# EAGLE board BOARD_FILE_ARDUINO_UNO (EAGLE 9.6.2)
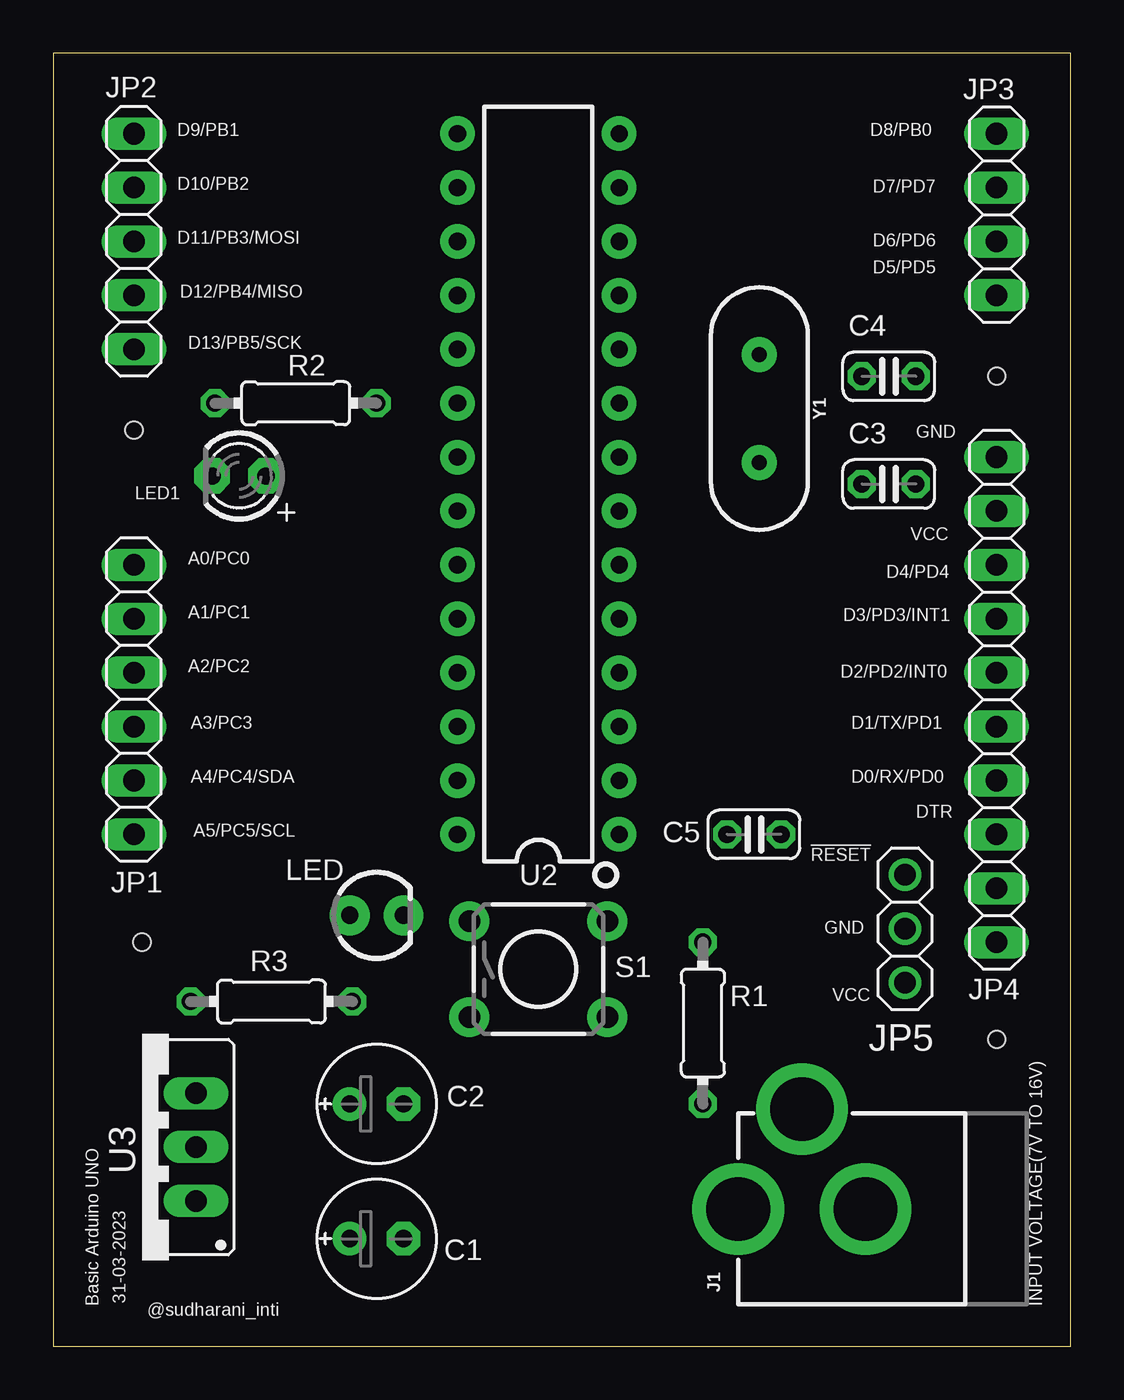
[diagram p0: board, top side]
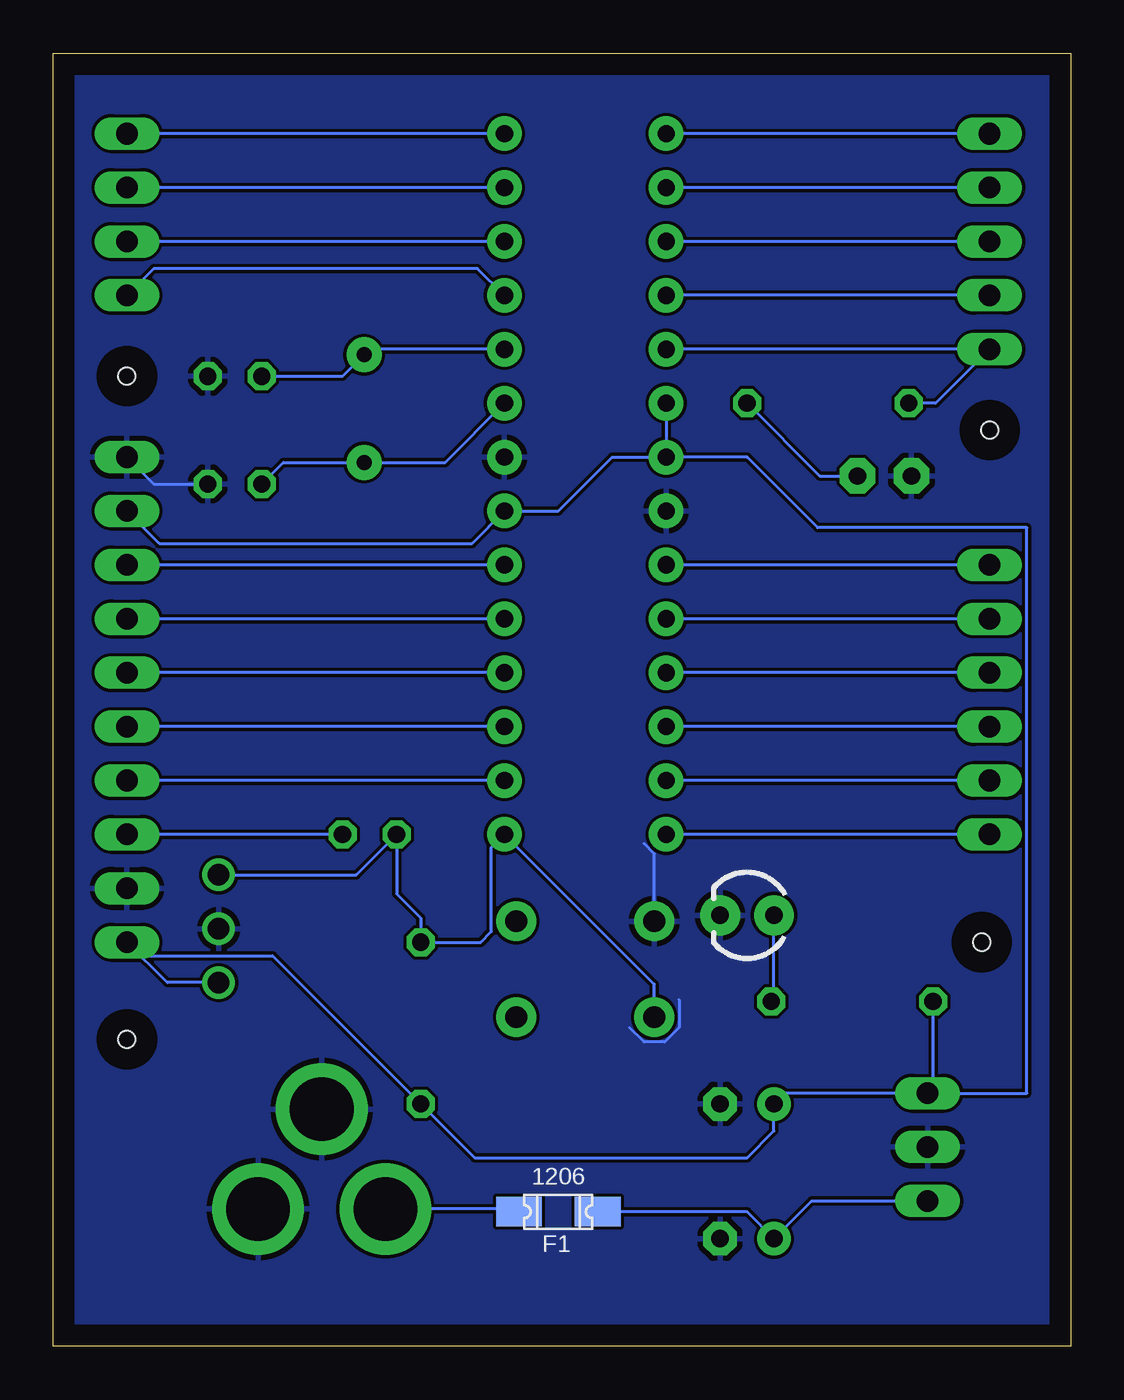
[diagram p1: board, bottom side, seen from below]

Size 47.93 x 60.95 mm. Coordinates in mm from the lower left corner, seen from the top.
Outline: 0,0 47.93,0 47.93,60.95 0,60.95 0,0
Copper layers (1*16): Top 0.035mm / dielectric 1.5mm / Bottom 0.035mm
Design rules "default": minimum track width 6mil, minimum drill 0.35mm, track to track 6mil, track to pad 6mil, pad to pad 6mil, via to via 6mil, smd to smd 6mil, copper to edge 40mil, drill to drill 6mil, minimum pad ring 10mil, minimum via ring 8mil, stop-mask expansion 4mil, vias tented up to drill 0mil, thermal gap 10mil
Holes 0.8 mm at 3.81,43.18 44.45,45.72 44.45,14.48 4.19,19.05

## Footprints (pad centres in the part's own frame; a part is rotated, then mirrored left to right if it is on the bottom)
E2,5-6E = drill 0.813 pad 1.575: + -1.27,0 | drill 0.813 pad 1.575 octagon: - 1.27,0
C025-024X044 = drill 0.813 octagon: 1 -1.27,0; 2 1.27,0
1206L = smd 2.16 x 1.4: P$1 -1.85,0; P$2 1.85,0
POWER_JACK_PTH = drill 2.997 pad 4.318: GND 0,7.7; GNDBREAK 4.7,10.7; PWR 0,13.7
1X06 = drill 1.016 long: 1 -6.35,0; 2 -3.81,0; 3 -1.27,0; 4 1.27,0; 5 3.81,0; 6 6.35,0
1X05 = drill 1.016 long: 1 -5.08,0; 2 -2.54,0; 3 0,0; 4 2.54,0; 5 5.08,0
1X04 = drill 1.016 long: 1 -3.81,0; 2 -1.27,0; 3 1.27,0; 4 3.81,0
1X10 = drill 1.016 long: 1 -11.43,0; 2 -8.89,0; 3 -6.35,0; 4 -3.81,0; 5 -1.27,0; 6 1.27,0; 7 3.81,0; 8 6.35,0; 9 8.89,0; 10 11.43,0
1X03 = drill 1.016: 1 -2.54,0; 2 0,0; 3 2.54,0
LED_3MM = drill 0.813 pad 1.88: A -1.27,0; K 1.27,0
LED3MM = drill 0.813 pad 1.676 octagon: A -1.27,0; K 1.27,0
0204/7 = drill 0.813 octagon: 1 -3.81,0; 2 3.81,0
TACTILE_SWITCH_PTH_6.0MM = drill 1.016 pad 1.88: 1 -3.251,2.261; 2 3.251,2.261; 3 -3.251,-2.261; 4 3.251,-2.261
DIP28 = drill 0.813 pad 1.626: 1 -16.51,-3.81; 2 -13.97,-3.81; 3 -11.43,-3.81; 4 -8.89,-3.81; 5 -6.35,-3.81; 6 -3.81,-3.81; 7 -1.27,-3.81; 8 1.27,-3.81; 9 3.81,-3.81; 10 6.35,-3.81; 11 8.89,-3.81; 12 11.43,-3.81; 13 13.97,-3.81; 14 16.51,-3.81; 15 16.51,3.81; 16 13.97,3.81; 17 11.43,3.81; 18 8.89,3.81; 19 6.35,3.81; 20 3.81,3.81; 21 1.27,3.81; 22 -1.27,3.81; 23 -3.81,3.81; 24 -6.35,3.81; 25 -8.89,3.81; 26 -11.43,3.81; 27 -13.97,3.81; 28 -16.51,3.81
78XXS = drill 1.016 long: GND 0,-2.54; IN -2.54,-2.54; OUT 2.54,-2.54
HC49US = drill 0.7 pad 1.651: 1 -2.54,0; 2 2.54,0

## Placement (x,y rotation side)
C1  10uf  [E2,5-6E]  15.24,5.08 0 top
C2  10uf  [E2,5-6E]  15.24,11.43 0 top
C3  22pf  [C025-024X044]  39.37,40.64 0 top
C4  22pf  [C025-024X044]  39.37,45.72 0 top
C5  0.1uf  [C025-024X044]  33.02,24.13 0 top
F1  1206L  [1206L]  24.13,6.35 0 bottom
J1  POWER_JACK  [POWER_JACK_PTH]  45.97,6.48 90 top
JP1  [1X06]  3.81,30.48 270 top
JP2  [1X05]  3.81,52.07 270 top
JP3  [1X04]  44.45,53.34 90 top
JP4  [1X10]  44.45,30.48 90 top
JP5  [1X03]  40.13,19.68 90 top
LED  RED  [LED_3MM]  15.24,20.32 0 top
LED1  GREEN  [LED3MM]  8.76,41.02 180 top
R1  10k  [0204/7]  30.61,15.24 270 top
R2  220E  [0204/7]  11.43,44.45 0 top
R3  220E  [0204/7]  10.29,16.26 0 top
S1  SPST  [TACTILE_SWITCH_PTH_6.0MM]  22.86,17.78 0 top
U2  328P  [DIP28]  22.86,40.64 90 top
U3  7805  [78XXS]  4.19,9.4 90 top
Y1  16MHz  [HC49US]  33.27,44.2 270 top

## Library data of the parts
C1-C5 = rcl; SPICEPREFIX: C
F1 = ptc-littlefuse
J1 = SparkFun-Connectors; PROD_ID: CONN-08197
JP1-JP4 = pinhead
JP5 LED1 = adafruit
LED = SparkFun-LED; PROD_ID: DIO-08794
R1-R3 = rcl; SPICEPREFIX: R
S1 = SparkFun-Switches; PROD_ID: SWCH-08441; SF_SKU: COM-00097
U2 = SparkFun-IC-Microcontroller; PROD_ID: IC-09136
U3 = v-reg
Y1 = SparkFun-Clocks; PROD_ID: XTAL-08181; SF_ID: COM-00536

## Nets
!RESET: C5.1 JP5.3 R1.1 S1.3 U2.1
A0: JP1.1 U2.23
A1: JP1.2 U2.24
A2: JP1.3 U2.25
A3: JP1.4 U2.26
A4: JP1.5 U2.27
A5: JP1.6 U2.28
D2: JP4.6 U2.4
D3: JP4.7 U2.5
D4: JP4.8 U2.6
D5: JP3.1 U2.11
D6: JP3.2 U2.12
D7: JP3.3 U2.13
D8: JP3.4 U2.14
D9: JP2.1 U2.15
D10: JP2.2 U2.16
D11: JP2.3 U2.17
D12: JP2.4 U2.18
D13: JP2.5 R2.1 U2.19
DTR: C5.2 JP4.3
GND: C1.- C2.- C3.2 C4.2 J1.GND J1.GNDBREAK JP4.2 JP4.10 JP5.2 LED1.K LED.K S1.1 U2.8 U2.22 U3.GND
N$1: C1.+ F1.P$2 U3.IN
N$2: C3.1 U2.9 Y1.2
N$3: C4.1 U2.10 Y1.1
N$5: LED.A R3.2
N$6: LED1.A R2.2
N$8: F1.P$1 J1.PWR
RX: JP4.4 U2.2
TX: JP4.5 U2.3
VCC: C2.+ JP4.1 JP4.9 JP5.1 R1.2 R3.1 U2.7 U2.20 U2.21 U3.OUT

## Tracks (layer width: path | path; a pad name or v marks a point on that pad's centre or on a via)
!RESET
  Bottom 0.152: JP5.3 33.65,22.23 C5.1 31.75,21.34 30.61,20.19 R1.1 27.79,19.05 27.28,19.56 27.28,23.52 U2.1 19.61,17.07 S1.3
A0
  Bottom 0.152: JP1.1 U2.23
A1
  Bottom 0.152: JP1.2 U2.24
A2
  Bottom 0.152: JP1.3 U2.25
A3
  Bottom 0.152: JP1.4 U2.26
A4
  Bottom 0.152: JP1.5 U2.27
A5
  Bottom 0.152: JP1.6 U2.28
D2
  Bottom 0.152: U2.4 JP4.6
D3
  Bottom 0.152: U2.5 JP4.7
D4
  Bottom 0.152: U2.6 JP4.8
D5
  Bottom 0.152: U2.11 27.94,50.8 43.18,50.8 JP3.1
D6
  Bottom 0.152: U2.12 JP3.2
D7
  Bottom 0.152: U2.13 JP3.3
D8
  Bottom 0.152: U2.14 JP3.4
D9
  Bottom 0.152: JP2.1 U2.15
D10
  Bottom 0.152: JP2.2 U2.16
D11
  Bottom 0.152: JP2.3 U2.17
D12
  Bottom 0.152: JP2.4 U2.18
D13
  Bottom 0.152: U2.19 JP2.5 6.35,44.45 R2.1
DTR
  Bottom 0.152: C5.2 JP4.3
GND
  Bottom 0.152: S1.1 19.61,23.22 20.09,23.7 | JP4.10 43.18,40.64 C3.2 | 18.44,16.33 18.44,15.04 19.12,14.35 20.09,14.35 20.78,15.04
  pour Bottom: 0,0 0,60.96 48.26,60.96 48.26,0
N$1
  Bottom 0.152: U3.IN 12.19,6.86 C1.+ 15.24,6.35 21.59,6.35 F1.P$2
N$2
  Bottom 0.152: U2.9 29.46,41.66 Y1.2 37.08,41.66 C3.1
N$3
  Bottom 0.152: U2.10 33.02,46.99 Y1.1 34.29,45.72 C4.1
N$5
  Bottom 0.152: R3.2 13.97,16.38 LED.A
N$6
  Bottom 0.152: R2.2 11.81,41.02 LED1.A
N$8
  Bottom 0.152: F1.P$1 26.11,6.48 J1.PWR
RX
  Bottom 0.152: U2.2 JP4.4
TX
  Bottom 0.152: U2.3 JP4.5
VCC
  Bottom 0.152: JP4.9 42.93,37.85 28.19,37.85 U2.7 24.13,39.37 21.59,41.91 U2.21 | U3.OUT 13.46,11.94 C2.+ 13.97,10.16 15.24,8.89 28.07,8.89 R1.2 37.59,18.41 43.81,18.41 JP4.1 42.54,17.14 JP5.1 | U3.OUT 6.48,12.19 R3.1 | U3.OUT 2.06,11.94 2.06,38.58 11.91,38.58 15.24,41.91 U2.21 | U2.20 U2.21

## Text on the board
_tsilk: D9/PB1 | D8/PB0 | D10/PB2 | D7/PD7 | D11/PB3/MOSI | D6/PD6 | D5/PD5 | D12/PB4/MISO | D13/PB5/SCK | GND | VCC | A0/PC0 | D4/PD4 | A1/PC1 | D3/PD3/INT1 | A2/PC2 | D2/PD2/INT0 | A3/PC3 | D1/TX/PD1 | A4/PC4/SDA | D0/RX/PD0 | DTR | A5/PC5/SCL | !RESET | GND | VCC | Basic Arduino UNO | 31-03-2023 | @sudharani_inti | INPUT VOLTAGE(7V TO 16V)
_bsilk: 1206 | F1